# EAGLE board Photoresistors_Master-Slave (EAGLE 9.7.0)

Size 230.07 x 116.26 mm. Coordinates in mm from the lower left corner, seen from the top.
Outline: 0,0 230.07,0 230.07,116.26 0,116.26 0,0
Copper layers (1*16): Top 0.035mm / dielectric 1.5mm / Bottom 0.035mm
Design rules "default": minimum track width 6mil, minimum drill 0.35mm, track to track 6mil, track to pad 6mil, pad to pad 6mil, via to via 6mil, smd to smd 6mil, copper to edge 40mil, drill to drill 6mil, minimum pad ring 10mil, minimum via ring 8mil, stop-mask expansion 4mil, vias tented up to drill 0mil, thermal gap 10mil

## Footprints (pad centres in the part's own frame; a part is rotated, then mirrored left to right if it is on the bottom)
GL5528 = drill 0.8 pad 1.4: 1 -1.702,0; 2 1.702,0
RESAD1016W63L850D250B = drill 0.83 pad 1.43: 1 -5.08,0; 2 5.08,0
ARDUINO-UNO-R3-SHIELD = drill 1.016 pad 1.88: 3.3V 24.13,-2.54; 5V 24.13,0; A0 24.13,12.7; A1 24.13,15.24; A2 24.13,17.78; A3 24.13,20.32; A4 24.13,22.86; A5 24.13,25.4; AREF -24.13,-13.97; D2 -24.13,20.32; D3 -24.13,17.78; D4 -24.13,15.24; D5 -24.13,12.7; D6 -24.13,10.16; D7 -24.13,7.62; D8 -24.13,3.81; D9 -24.13,1.27; D10 -24.13,-1.27; D11 -24.13,-3.81; D12 -24.13,-6.35; D13 -24.13,-8.89; GND@0 24.13,2.54; GND@1 24.13,5.08; GND@2 -24.13,-11.43; IOREF 24.13,-7.62; NC 24.13,-10.16; RES 24.13,-5.08; RX -24.13,25.4; SCL -24.13,-19.05; SDA -24.13,-16.51; TX -24.13,22.86; VIN 24.13,7.62

## Placement (x,y rotation side)
R1  PHOTOCELL_GL5528  [GL5528]  7.6,24.21 0 top
R2  PHOTOCELL_GL5528  [GL5528]  20.3,24.21 0 top
R3  PHOTOCELL_GL5528  [GL5528]  33,24.21 0 top
R4  PHOTOCELL_GL5528  [GL5528]  45.7,24.21 0 top
R5  PHOTOCELL_GL5528  [GL5528]  58.4,24.21 0 top
R6  10k  [RESAD1016W63L850D250B]  6.33,8.97 90 top
R7  10k  [RESAD1016W63L850D250B]  19.03,8.97 90 top
R8  10k  [RESAD1016W63L850D250B]  31.73,8.97 90 top
R9  10k  [RESAD1016W63L850D250B]  44.43,8.97 90 top
R10  10k  [RESAD1016W63L850D250B]  57.13,8.97 90 top
R11  PHOTOCELL_GL5528  [GL5528]  149.11,25.59 0 top
R12  PHOTOCELL_GL5528  [GL5528]  161.81,25.59 0 top
R13  PHOTOCELL_GL5528  [GL5528]  174.51,25.59 0 top
R14  PHOTOCELL_GL5528  [GL5528]  187.21,25.59 0 top
R15  PHOTOCELL_GL5528  [GL5528]  199.91,25.59 0 top
R16  10k  [RESAD1016W63L850D250B]  147.84,10.35 90 top
R17  10k  [RESAD1016W63L850D250B]  160.54,10.35 90 top
R18  10k  [RESAD1016W63L850D250B]  173.24,10.35 90 top
R19  10k  [RESAD1016W63L850D250B]  185.94,10.35 90 top
R20  10k  [RESAD1016W63L850D250B]  198.64,10.35 90 top
UMASTER  ARDUINO-UNO-R3-SHIELD  [ARDUINO-UNO-R3-SHIELD]  54.87,85.82 270 top
USLAVE  ARDUINO-UNO-R3-SHIELD  [ARDUINO-UNO-R3-SHIELD]  195.56,86.42 270 top

## Library data of the parts
R1-R20 UMASTER USLAVE = Tinkercad

## Nets
UMASTER_5V: R6.1 R7.1 R8.1 R9.1 R10.1 UMASTER.5V
UMASTER_A0: R5.1 R10.2 UMASTER.A0
UMASTER_A1: R4.1 R9.2 UMASTER.A1
UMASTER_A2: R3.1 R8.2 UMASTER.A2
UMASTER_A3: R2.1 R7.2 UMASTER.A3
UMASTER_A4: R1.1 R6.2 UMASTER.A4
UMASTER_GND: R1.2 R2.2 R3.2 R4.2 R5.2 R11.2 R12.2 R13.2 R14.2 R15.2 UMASTER.GND@0 UMASTER.GND@1 UMASTER.GND@2 USLAVE.GND@0 USLAVE.GND@1 USLAVE.GND@2
USLAVE_5V: R16.1 R17.1 R18.1 R19.1 R20.1 USLAVE.5V
USLAVE_A0: R15.1 R20.2 USLAVE.A0
USLAVE_A1: R14.1 R19.2 USLAVE.A1
USLAVE_A2: R13.1 R18.2 USLAVE.A2
USLAVE_A3: R12.1 R17.2 USLAVE.A3
USLAVE_A4: R11.1 R16.2 USLAVE.A4
USLAVE_D10: UMASTER.D11 USLAVE.D10
USLAVE_D11: UMASTER.D10 USLAVE.D11

## Tracks (layer width: path | path; a pad name or v marks a point on that pad's centre or on a via)
UMASTER_5V  (5 unrouted)
UMASTER_A0  (2 unrouted)
UMASTER_A1  (2 unrouted)
UMASTER_A2  (2 unrouted)
UMASTER_A3  (2 unrouted)
UMASTER_A4  (2 unrouted)
UMASTER_GND  (15 unrouted)
USLAVE_5V  (5 unrouted)
USLAVE_A0  (2 unrouted)
USLAVE_A1  (2 unrouted)
USLAVE_A2  (2 unrouted)
USLAVE_A3  (2 unrouted)
USLAVE_A4  (2 unrouted)
USLAVE_D10  (1 unrouted)
USLAVE_D11  (1 unrouted)